# EAGLE board Bridge (EAGLE 5.11)
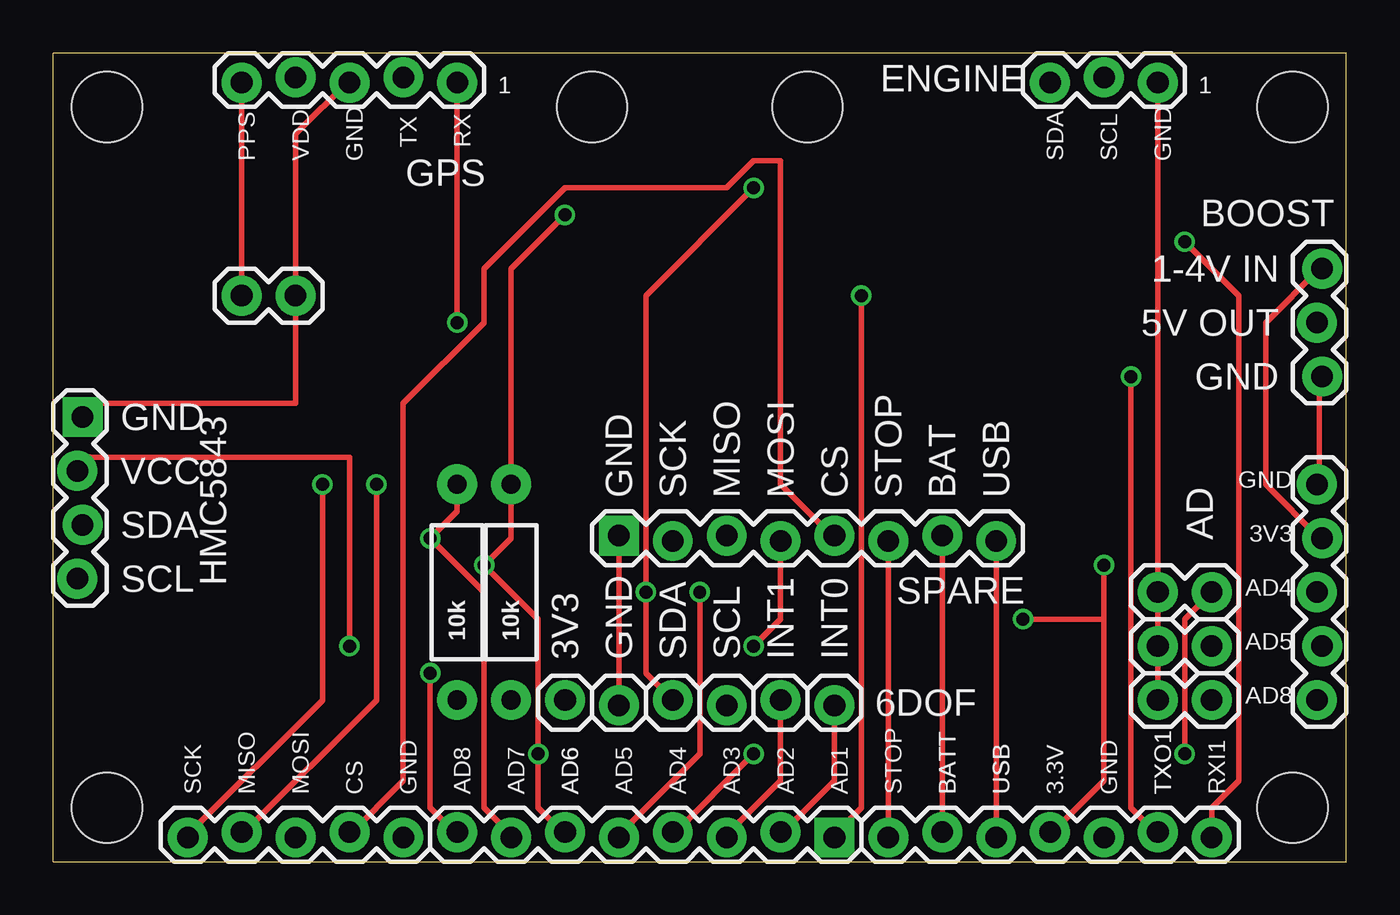
[diagram p0: board, top side]
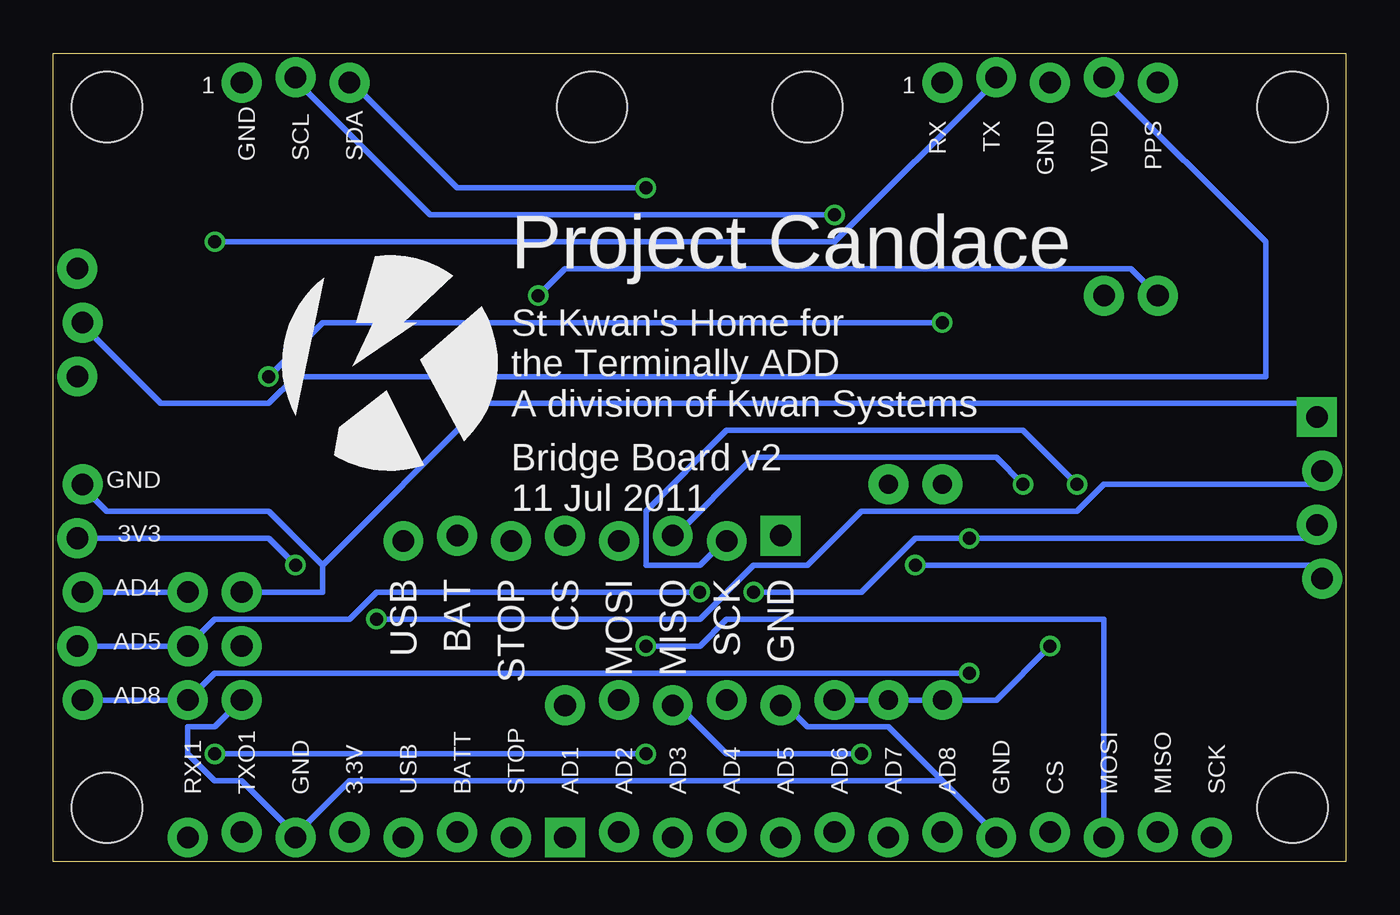
[diagram p1: board, bottom side, seen from below]

Size 60.96 x 38.1 mm. Coordinates in mm from the lower left corner, seen from the top.
Outline: 0,0 60.96,0 60.96,38.1 0,38.1 0,0
Copper layers (1*16): Top 0.0356mm / dielectric 1.5011mm / Bottom 0.0356mm
Design rules "LaenPCBOrder": minimum track width 6mil, minimum drill 13mil, track to track 6mil, track to pad 6mil, pad to pad 6mil, via to via 6mil, smd to smd 6mil, copper to edge 15mil, drill to drill 6mil, minimum pad ring 7mil, minimum via ring 7mil, stop-mask expansion 4mil, vias tented up to drill 0mil, thermal gap 10mil
vRestrict: area 42.5,21 to 47.6,26; area 20.3,21 to 39.4,26; area 11.4,21 to 18.4,22.2; area 25.4,27.3 to 39.4,31.1; area 7,27.9 to 22.9,30.5; area 22.9,18.4 to 39.4,19.7; area 27.3,16.5 to 39.4,17.8; area 36.2,9.5 to 37.5,13.3; area 38.7,7 to 43.2,8.3; area 5.7,3.2 to 7,5.7; area 8.3,3.2 to 9.5,5.7; area 10.8,3.2 to 12.1,5.7; 10 more areas

## Footprints (pad centres in the part's own frame; a part is rotated, then mirrored left to right if it is on the bottom)
1X06_LOCK = drill 1.016 pad 1.88 round: 1 0,0; 2 2.54,-0.254; 3 5.08,0; 4 7.62,-0.254; 5 10.16,0; 6 12.7,-0.254
1X05_LOCK = drill 1.016 pad 1.88 round: 1 0,0.127; 2 2.54,-0.127; 3 5.08,0.127; 4 7.62,-0.127; 5 10.16,0.127
1X02 = drill 1.016 pad 1.88 round: 1 0,0; 2 2.54,0
1X03_LOCK = drill 1.016 pad 1.88 round: 1 0,0.127; 2 2.54,-0.127; 3 5.08,0.127
1X04_LOCK = drill 1.016 pad 1.88 square: 1 0,0.127 | drill 1.016 pad 1.88 round: 2 2.54,-0.127; 3 5.08,0.127; 4 7.62,-0.127
1X08_LOCK = drill 1.016 pad 1.88 square: 1 0,0.127 | drill 1.016 pad 1.88 round: 2 2.54,-0.127; 3 5.08,0.127; 4 7.62,-0.127; 5 10.16,0.127; 6 12.7,-0.127; 7 15.24,0.127; 8 17.78,-0.127
1X07_LOCK = drill 1.016 pad 1.88 round: 1 0,0.127; 2 2.54,-0.127; 3 5.08,0.127; 4 7.62,-0.127; 5 10.16,0.127; 6 12.7,-0.127; 7 15.24,0.127
AXIAL-0.4 = drill 0.9 pad 1.88 round: P$1 -5.08,0; P$2 5.08,0
STAND-OFF = hole 3.302: 0,0

## Placement (x,y rotation side)
6DOF  [1X06_LOCK]  24.13,7.62 0 top
AD  [1X05_LOCK]  59.69,7.62 90 top
AD4  [1X02]  52.07,12.7 0 top
AD5  [1X02]  52.07,10.16 0 top
AD8  [1X02]  52.07,7.62 0 top
BOOST  [1X03_LOCK]  59.69,27.94 270 top
ENGINE  [1X03_LOCK]  52.07,36.83 180 top
GPS  [1X05_LOCK]  19.05,36.83 180 top
HMC5843  [1X04_LOCK]  1.27,20.95 270 top
JP1  [1X05_LOCK]  16.51,1.27 180 top
JP2  [1X08_LOCK]  36.83,1.27 180 top
JP3  [1X07_LOCK]  54.61,1.27 180 top
PPS  [1X02]  8.89,26.67 0 top
RSCL  10k  [AXIAL-0.4]  21.59,12.7 90 top
RSDA  10k  [AXIAL-0.4]  19.05,12.7 90 top
SPARE  [1X08_LOCK]  26.67,15.24 0 top
U$1  [STAND-OFF]  2.54,2.54 0 top
U$2  [STAND-OFF]  2.54,35.56 0 top
U$3  [STAND-OFF]  58.42,2.54 0 top
U$4  [STAND-OFF]  58.42,35.56 0 top
U$5  [KWAN_CIRCLE]  45.09,23.5 0 bottom
U$6  [STAND-OFF]  25.4,35.56 0 top
U$7  [STAND-OFF]  35.56,35.56 0 top

## Library data of the parts
6DOF AD AD4 AD5 AD8 BOOST ENGINE GPS HMC5843 JP1-JP3 PPS RSCL RSDA SPARE U$1-U$7 = SparkFun

## Nets
3.3V: 6DOF.1 AD.4 BOOST.1 HMC5843.2 JP3.4 RSCL.P$1 RSDA.P$1
5V: BOOST.2 GPS.4
AD1: GPS.5 JP2.1 PPS.1
AD2: 6DOF.6 JP2.2
AD3: 6DOF.5 JP2.3
AD6: 6DOF.4 ENGINE.2 HMC5843.4 JP2.6 RSCL.P$2
AD7: 6DOF.3 ENGINE.3 HMC5843.3 JP2.7 RSDA.P$2
GND: 6DOF.2 AD4.1 AD5.1 AD8.1 AD.5 BOOST.3 ENGINE.1 GPS.3 HMC5843.1 JP1.1 JP3.3 PPS.2 SPARE.1
N$1: AD4.2 AD.3 JP2.4
N$2: AD5.2 AD.2 JP2.5
N$3: AD8.2 AD.1 JP2.8
N$4: JP1.5 SPARE.2
N$5: JP1.4 SPARE.3
N$6: JP1.3 SPARE.4
N$7: JP1.2 SPARE.5
N$8: JP3.7 SPARE.6
N$9: JP3.6 SPARE.7
N$10: JP3.5 SPARE.8
RXI1: GPS.2 JP3.1
TX01: GPS.1 JP3.2

## Tracks (layer width: path | path; a pad name or v marks a point on that pad's centre or on a via)
3.3V  (via drill 0.61)
  Top 0.254: v13.97,10.16 13.97,19.05 1.27,19.05 HMC5843.2 | 49.53,11.43 v49.53,13.97 | 49.53,11.43 49.53,3.81 46.99,1.27 JP3.4 | BOOST.1 59.69,27.94 57.15,25.4 57.15,17.78 59.69,15.24 AD.4 | v45.72,11.43 49.53,11.43
  Bottom 0.254: 6DOF.1 RSCL.P$1 RSDA.P$1 16.51,7.62 v13.97,10.16 | v49.53,13.97 50.8,15.24 AD.4 | v45.72,11.43 30.48,11.43 27.94,13.97 25.4,13.97 22.86,16.51 12.7,16.51 11.43,17.78 1.27,17.78 HMC5843.2
5V
  Bottom 0.254: GPS.4 11.43,36.83 3.81,29.21 3.81,22.86 49.53,22.86 50.8,21.59 55.88,21.59 59.69,25.4 BOOST.2
AD1  (via drill 0.61)
  Top 0.254: PPS.1 GPS.5 8.89,36.83 | v38.1,26.67 38.1,2.54 36.83,1.27 JP2.1
  Bottom 0.254: v38.1,26.67 36.83,27.94 10.16,27.94 PPS.1
AD2
  Top 0.254: JP2.2 34.29,1.27 36.83,3.81 6DOF.6 36.83,7.62
AD3
  Top 0.254: 6DOF.5 34.29,3.81 31.75,1.27 JP2.3
AD6  (via drill 0.61)
  Top 0.254: JP2.6 24.13,1.27 22.86,2.54 v22.86,5.08 22.86,11.43 v20.32,13.97 21.59,15.24 RSCL.P$2 21.59,27.94 v24.13,30.48
  Bottom 0.254: v20.32,13.97 1.27,13.97 HMC5843.4 | v22.86,5.08 29.21,5.08 31.75,7.62 6DOF.4 | v24.13,30.48 43.18,30.48 49.53,36.83 ENGINE.2
AD7  (via drill 0.61)
  Top 0.254: RSDA.P$2 19.05,16.51 v17.78,15.24 20.32,12.7 20.32,2.54 21.59,1.27 JP2.7 | 6DOF.3 27.94,8.89 v27.94,12.7 27.94,26.67 v33.02,31.75
  Bottom 0.254: HMC5843.3 1.27,15.24 v17.78,15.24 20.32,15.24 22.86,12.7 v27.94,12.7 | v33.02,31.75 41.91,31.75 46.99,36.83 ENGINE.3
GND
  Top 0.254: 6DOF.2 SPARE.1 | HMC5843.1 1.27,21.59 11.43,21.59 PPS.2 11.43,34.29 13.97,36.83 GPS.3 | AD.5 59.69,17.78 59.69,22.86 BOOST.3 | AD8.1 AD5.1 AD4.1 ENGINE.1 52.07,36.83
  Bottom 0.254: 19.05,3.81 21.59,6.35 25.4,6.35 26.67,7.62 6DOF.2 | 19.05,3.81 16.51,1.27 JP1.1 | 49.53,1.27 46.99,3.81 19.05,3.81 | 48.26,13.97 50.8,16.51 58.42,16.51 59.69,17.78 AD.5 | 48.26,13.97 48.26,12.7 AD4.1 | 48.26,13.97 40.64,21.59 1.27,21.59 HMC5843.1 | 49.53,1.27 52.07,3.81 53.34,3.81 54.61,5.08 54.61,6.35 53.34,6.35 AD8.1 | 49.53,1.27 JP3.3
N$1  (via drill 0.61)
  Top 0.254: v33.02,5.08 29.21,1.27 JP2.4 | v53.34,5.08 53.34,11.43 AD4.2
  Bottom 0.254: v33.02,5.08 v53.34,5.08 | AD4.2 AD.3 59.69,12.7
N$2  (via drill 0.61)
  Top 0.254: v30.48,12.7 30.48,5.08 26.67,1.27 JP2.5
  Bottom 0.254: v30.48,12.7 45.72,12.7 46.99,11.43 53.34,11.43 AD5.2 AD.2
N$3  (via drill 0.61)
  Top 0.254: v17.78,8.89 17.78,2.54 19.05,1.27 JP2.8
  Bottom 0.254: v17.78,8.89 53.34,8.89 AD8.2 AD.1 59.69,7.62
N$4  (via drill 0.61)
  Top 0.254: v12.7,17.78 12.7,7.62 6.35,1.27 JP1.5
  Bottom 0.254: v12.7,17.78 15.24,20.32 29.21,20.32 33.02,16.51 33.02,13.97 30.48,13.97 29.21,15.24 SPARE.2
N$5  (via drill 0.61)
  Top 0.254: v15.24,17.78 15.24,7.62 8.89,1.27 JP1.4
  Bottom 0.254: v15.24,17.78 16.51,19.05 27.94,19.05 31.75,15.24 SPARE.3
N$6  (via drill 0.61)
  Top 0.254: v33.02,10.16 34.29,11.43 SPARE.4 34.29,15.24
  Bottom 0.254: v33.02,10.16 30.48,10.16 29.21,11.43 11.43,11.43 JP1.3
N$7
  Top 0.254: JP1.2 13.97,1.27 16.51,3.81 16.51,21.59 20.32,25.4 20.32,27.94 24.13,31.75 31.75,31.75 33.02,33.02 34.29,33.02 34.29,17.78 36.83,15.24 SPARE.5
N$8
  Top 0.254: JP3.7 SPARE.6 39.37,15.24
N$9
  Top 0.254: 41.91,1.27 JP3.6 SPARE.7
N$10
  Top 0.254: JP3.5 SPARE.8 44.45,15.24
RXI1  (via drill 0.61)
  Top 0.254: v53.34,29.21 55.88,26.67 55.88,3.81 54.61,2.54 JP3.1
  Bottom 0.254: v53.34,29.21 24.13,29.21 16.51,36.83 GPS.2
TX01  (via drill 0.61)
  Top 0.254: v50.8,22.86 50.8,2.54 52.07,1.27 JP3.2 | v19.05,25.4 GPS.1 19.05,36.83
  Bottom 0.254: v50.8,22.86 48.26,25.4 v19.05,25.4

## Text on the board
tPlace: 1 | 1 | TX | RX | PPS | VDD | GND | SDA | SCL | GND | 1-4V IN | 5V OUT | GND | GND | VCC | GND | 3V3 | SDA | SCL | AD4 | AD5 | 3V3 | GND | SDA | SCL | INT1 | INT0 | AD8 | SCK | MISO | MOSI | CS | GND | AD8 | AD7 | AD6 | AD6 | AD5 | AD4 | AD3 | AD2 | AD1 | STOP | BATT | BATT | USB | USB | 3.3V | GND | TXO1 | TXO1 | RXI1
bPlace: 1 | 1 | PPS | VDD | GND | TX | RX | SDA | SCL | GND | Project Candace | St Kwan's Home for | the Terminally ADD | A division of Kwan Systems | Bridge Board v2 | GND | 11 Jul 2011 | 3V3 | AD4 | AD5 | AD8 | SCK | MISO | MOSI | CS | GND | AD8 | AD7 | AD6 | AD5 | AD4 | AD3 | AD2 | AD1 | STOP | BATT | USB | 3.3V | GND | TXO1 | RXI1
tNames: GND | SCK | MISO | MOSI | CS | STOP | BAT | USB
bNames: GND | SCK | MISO | MOSI | CS | STOP | BAT | USB